# Altium PCB top_pcb.PcbDoc
Units mm, origin at the board's own origin, x right, y up, seen from the top; angles counter-clockwise.
Board outline 50 x 70 mm, 4 copper layers (Top Layer, Signal Layer 1, Signal Layer 2, Bottom Layer), stack 0.463 mm thick; 108 components, 71 nets, 364 pads, 151 vias.
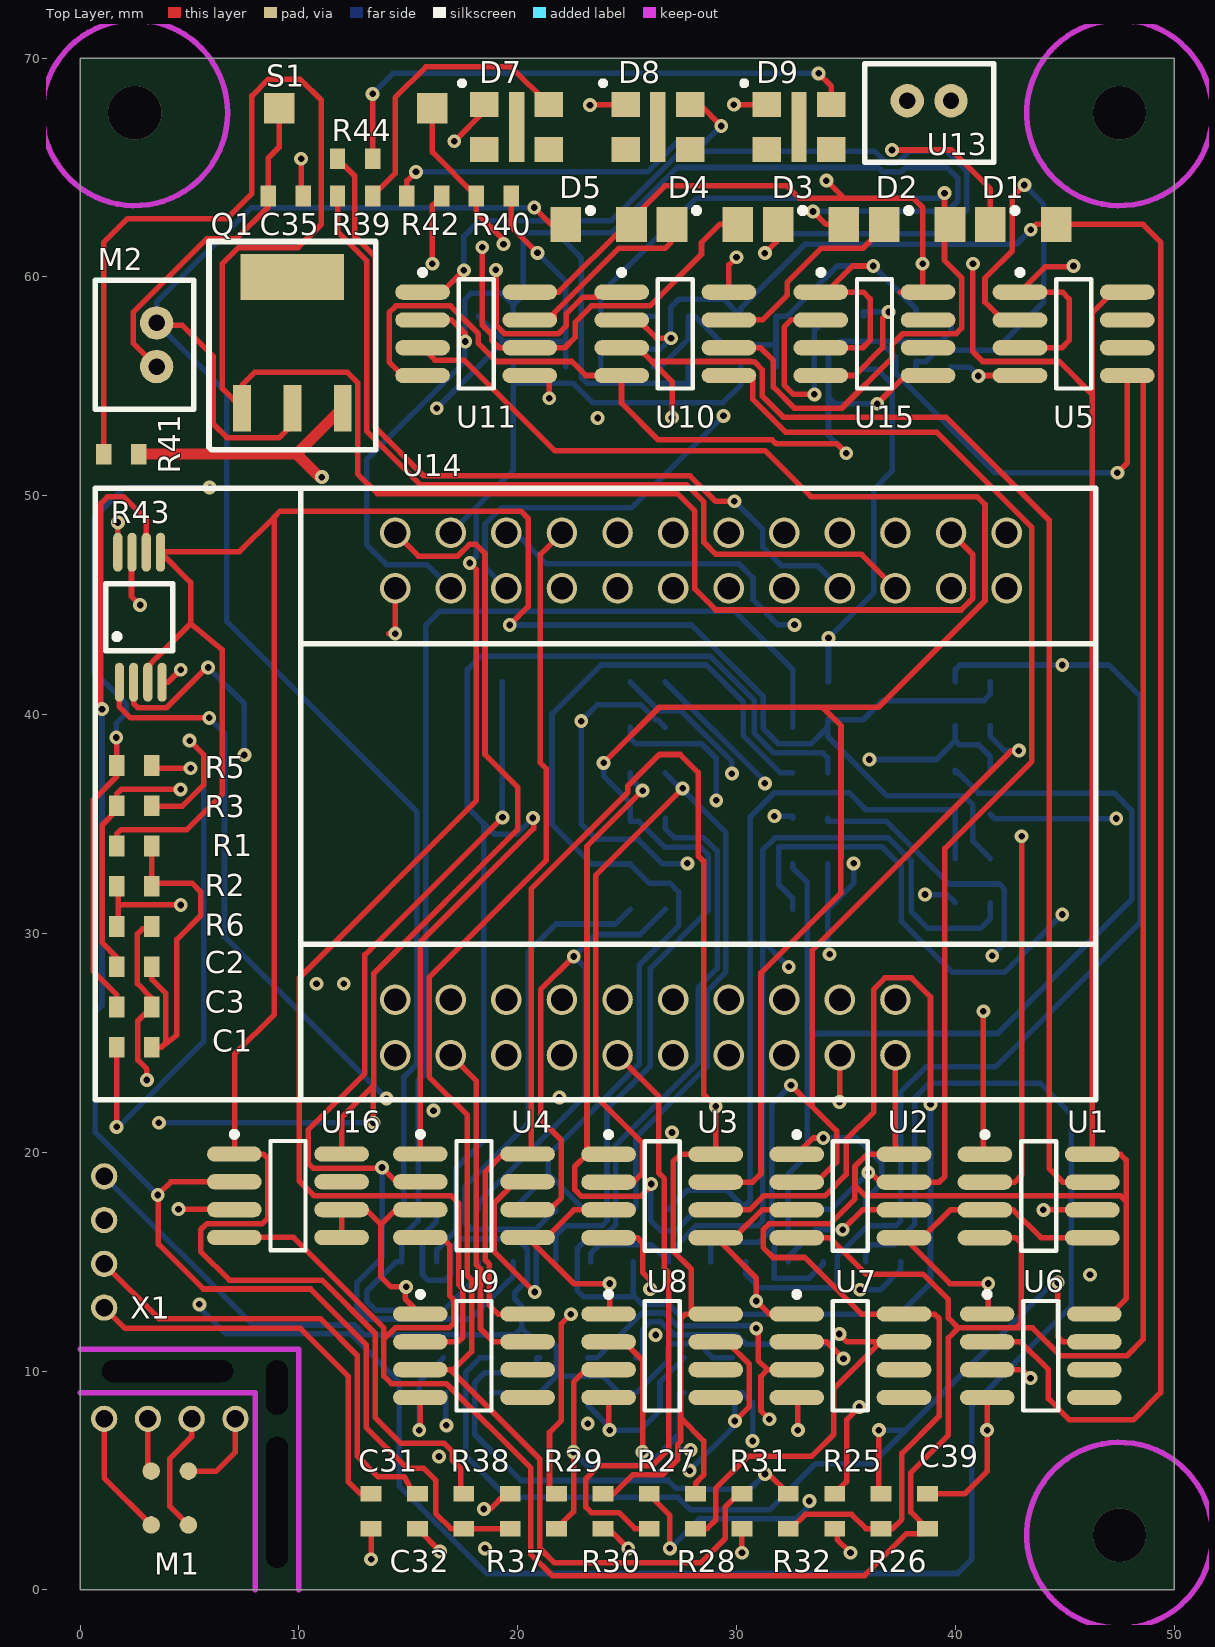
[diagram p0: Top Layer view]
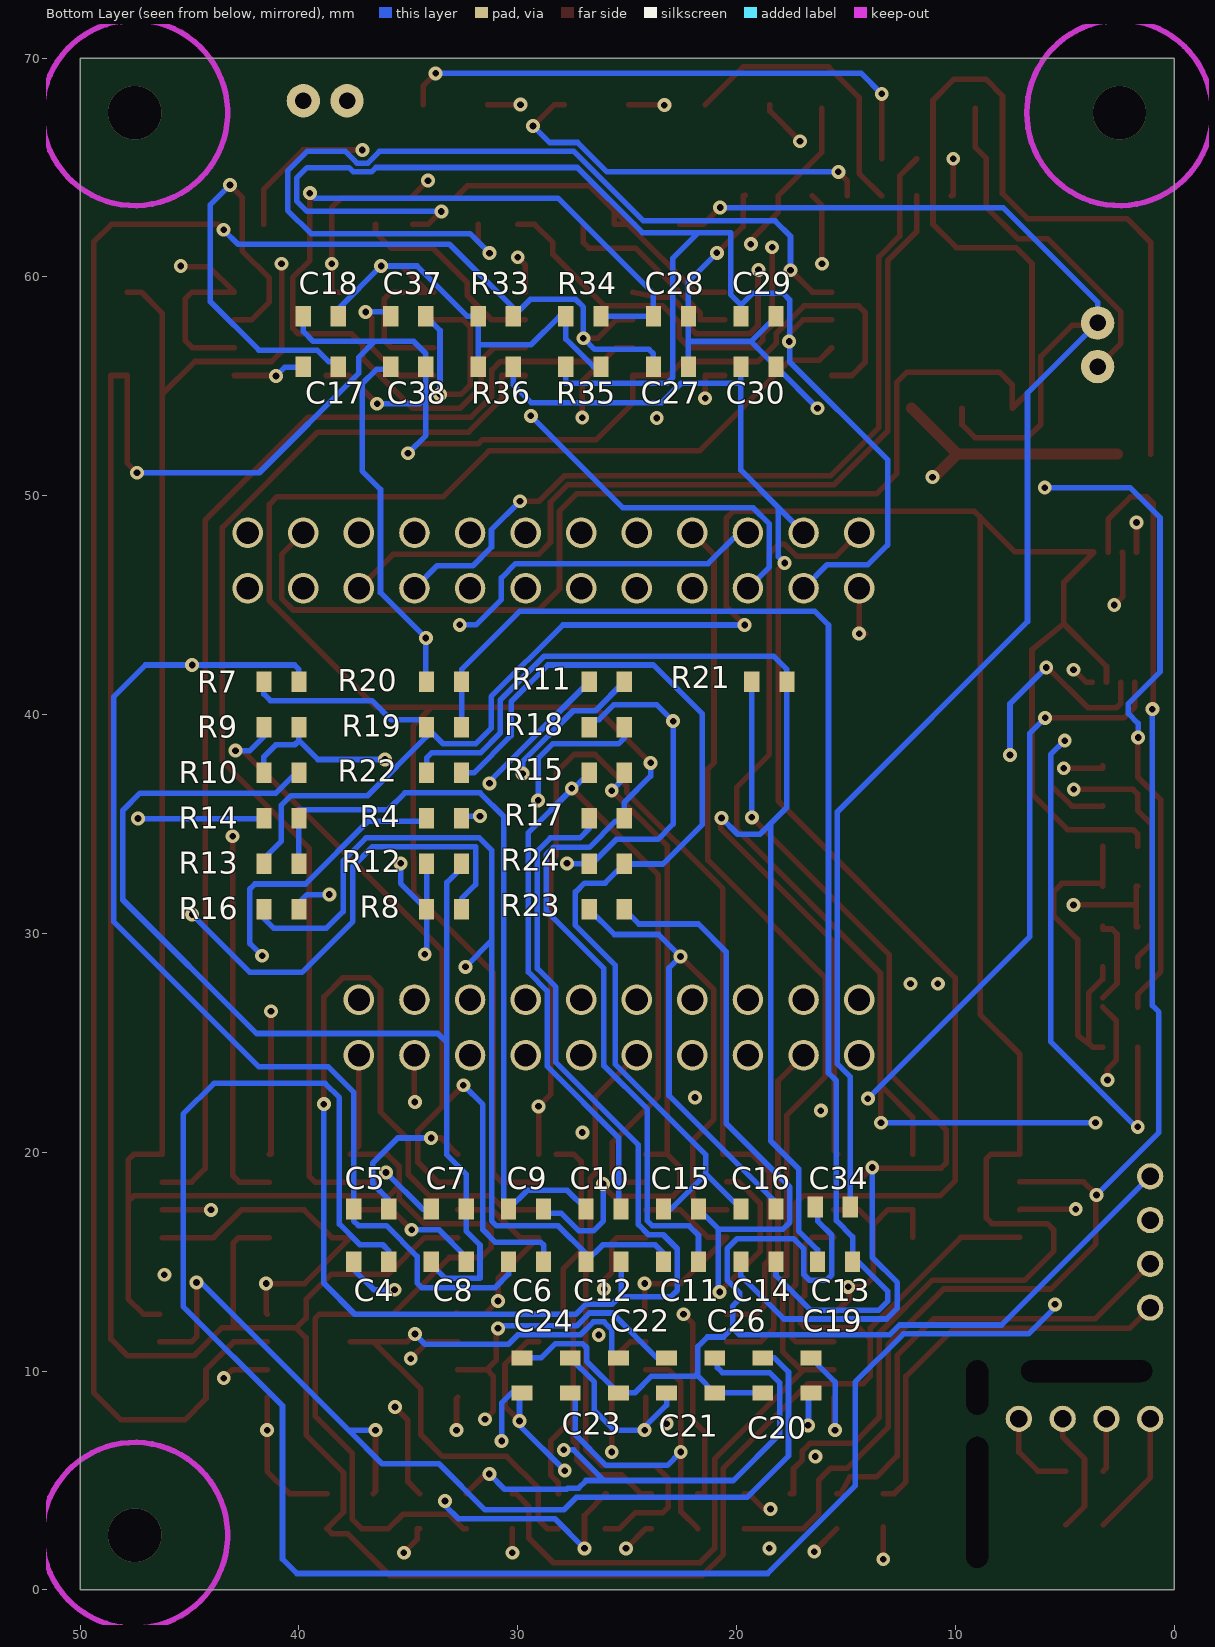
[diagram p1: Bottom Layer view, seen from below]
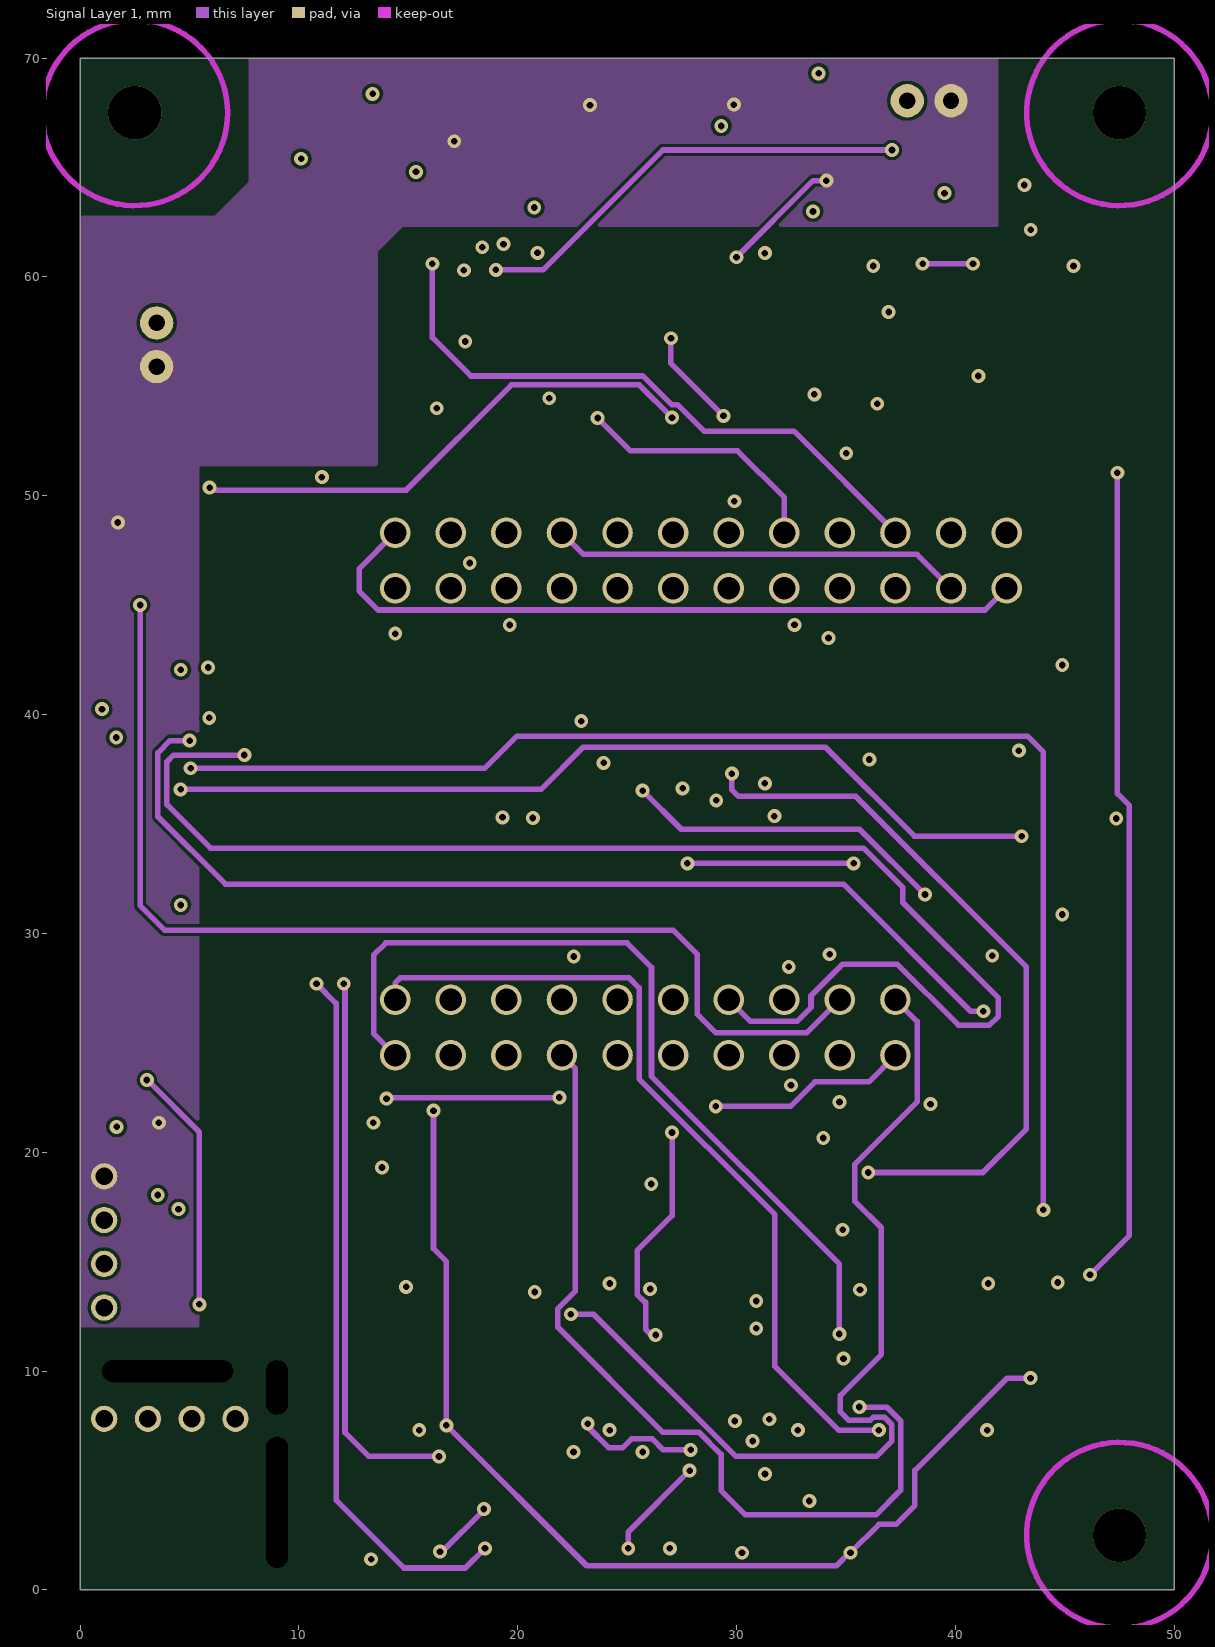
[diagram p2: Signal Layer 1]
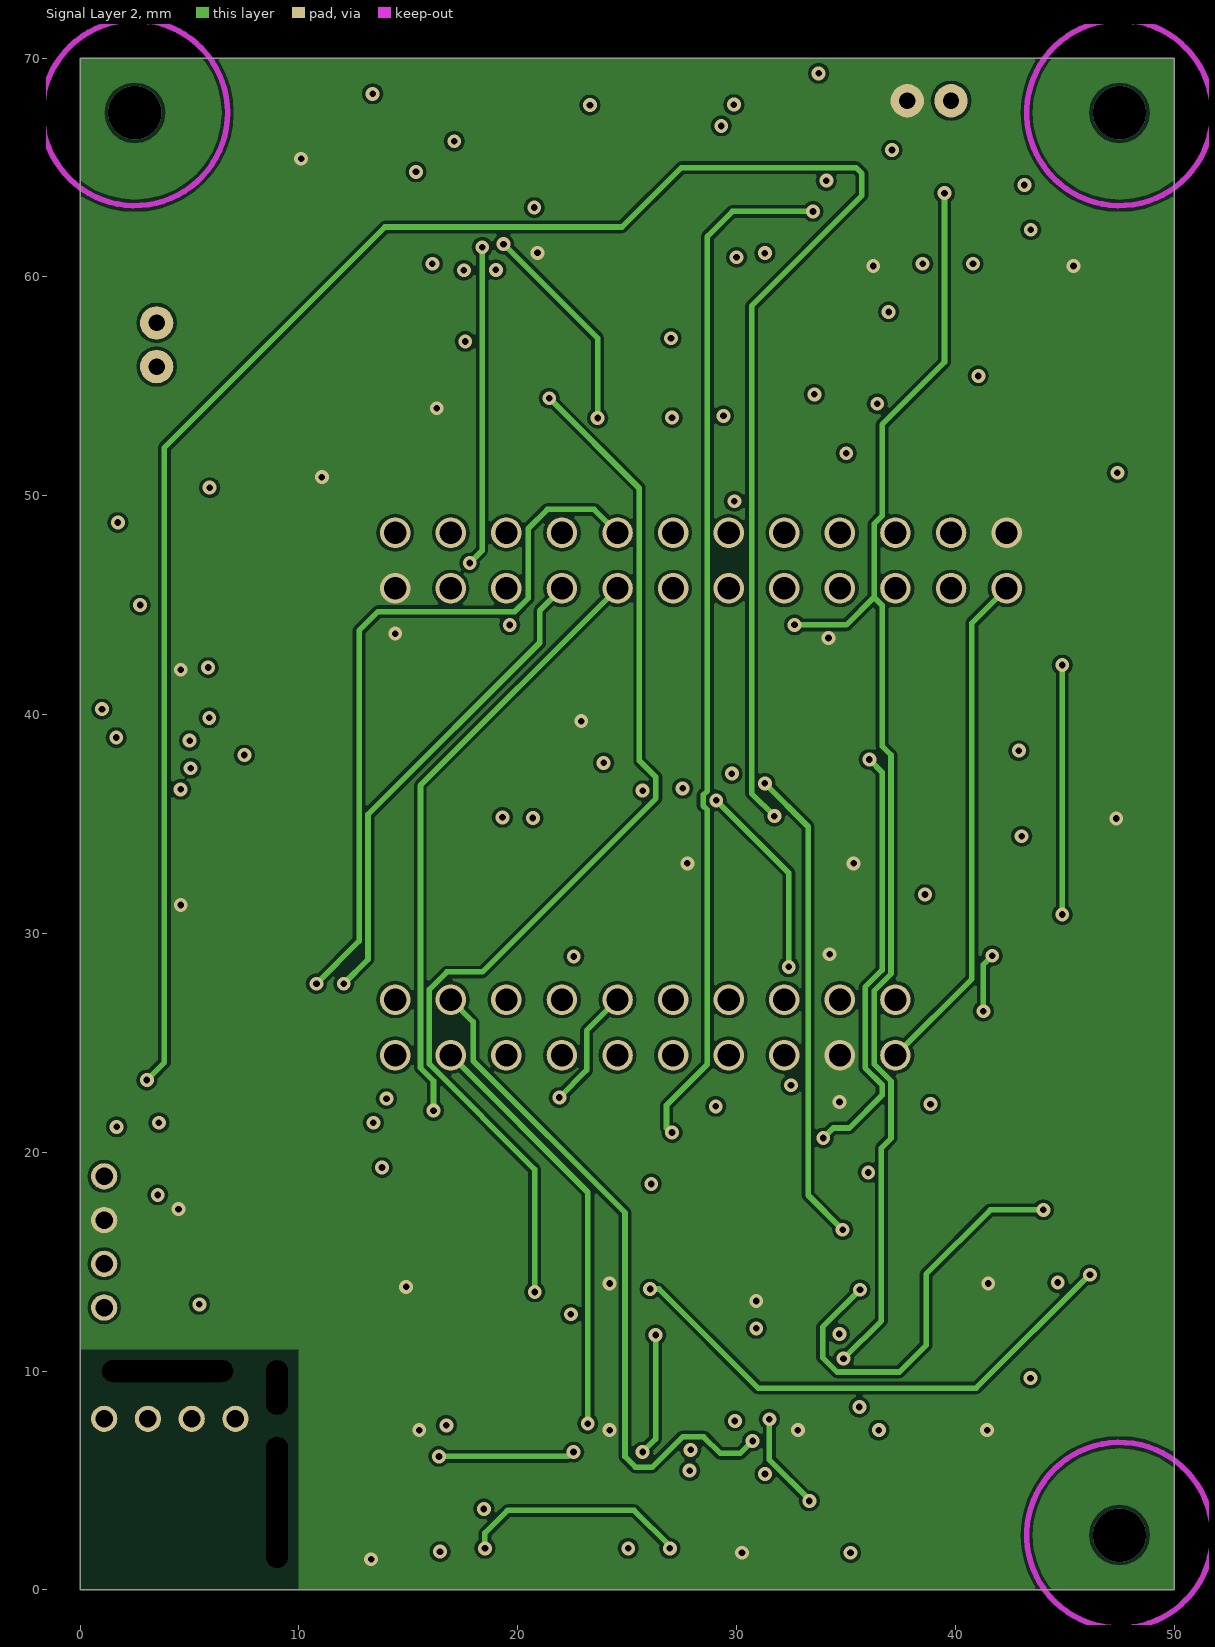
[diagram p3: Signal Layer 2]

## Layer stack, top to bottom
Top Solder: solder mask 0.0102, Solder Resist, Dk 3.5
Top Layer: signal copper 0.0356
Signal Layer 1: signal copper 0.036
Signal Layer 2: signal copper 0.036
Dielectric 1: dielectric 0.32, FR-4, Dk 4.8
Bottom Layer: signal copper 0.0356
Bottom Solder: solder mask 0.0102, Solder Resist, Dk 3.5

## Board outline
0,0 50,0 50,70 0,70

## Design rules (kind name [scope] priority, off if disabled: settings)
AssemblyTestPointUsage SilkToBoardRegionClearance_1 [All] p2:
AssemblyTestPointUsage SilkToBoardRegionClearance [All] p3:
Clearance [All] p1: gap=0.152
HoleSize [All] p1: absolutevalues=TRUE maxlimit=6.35 minlimit=0.3 maxpercent=80.000 minpercent=20.000
MatchedLengths DiffPair_DIFF100MatchedLengths [InDifferentialPairClass('DIFF100')] p1: tolerance=0.152 checknetsindiffpair=TRUE checkdiffpairvsdiffpair=FALSE checkothers=FALSE
MinimumSolderMaskSliver [All] p1: minsoldermaskwidth=0.1
MinimumSolderMaskSliver SilkscreenOverComponentPads_2 [All] p2: minsoldermaskwidth=0.254
MinimumSolderMaskSliver SilkToSolderMaskClearance_1 [IsPad] p3: minsoldermaskwidth=0.254
MinimumSolderMaskSliver SilkscreenOverComponentPads_1 [All] p4: minsoldermaskwidth=0.254
MinimumSolderMaskSliver SilkToSolderMaskClearance [IsPad] p5: minsoldermaskwidth=0.254
MinimumSolderMaskSliver SilkscreenOverComponentPads [All] p6: minsoldermaskwidth=0.254
PolygonConnect [All] p1: connectstyle=Direct reliefconductorwidth=0.254 reliefentries=4 polygonreliefangle="90 Angle" airgapwidth=0.254
RoutingVias [All] p1: holewidth=0.305 width=0.635 viastyle="Through Hole" minholewidth=0.305 minwidth=0.635 maxholewidth=0.711 maxwidth=1.27
SilkToBoardRegionClearance SilkToBoardRegionClearance_2 [All] p1:
SilkToSolderMaskClearance SilkToSolderMaskClearance_2 [IsPad] p1: minsilkscreentomaskgap=0.254 clearancetoexposedcopper=TRUE
SolderMaskExpansion [All] p1: expansion=0.102
UnpouredPolygon [All] p1: allowunpoured=FALSE
Width [All] p1: maxlimit=2.54 minlimit=0.152 preferedwidth=0.254
25 further rules are at their usual default settings.

## Classes and differential pairs
component class top: C34 C35 D5 M2 Q1 R41 U13
component class "PEAK DETECT": C27 C28 C29 C30 D1 D2 D3 D4 R33 R34 R35 R36 U10 U11
component class MIC_STAGE: C31 C32 M1 R37 R38 R43 U16 X1
component class MED_FILTER: C5 C6 C7 C8 R7 R8 R9 R10 R11 R12 U2
component class LOW_FILTER: C1 C2 C3 C4 R1 R2 R3 R4 R5 R6 U1
component class INVERTER: C17 C18 C37 C38 C39 U5 U15
component class HIGH_FILTER: C9 C10 C11 C12 R13 R14 R15 R16 R17 R18 U3
component class FIRE_FILTER: C13 C14 C15 C16 R19 R20 R21 R22 R23 R24 U4
component class COMPARATORS: C19 C20 C21 C22 C23 C24 C26 R25 R26 R27 R28 R29 R30 R31 R32 U6 U7 U8 U9
component class PSOC: D7 D8 D9 R39 R40 R42 R44 S1 U14

## Components (designator, comment, footprint, x,y, rotation, side; value= is the part's Value field where it differs from the comment)
C1 "100 nF" C0603#1 2.47,24.8 r180 top
C2 "100 nF" C0603#1 2.47,28.477 r180 top
C3 "100 nF" C0603#1 2.47,26.638 r0 top
C4 "100 nF" C0603#1 36.7,15 r180 bottom
C5 "10nF" C0603#1 36.7,17.4 r180 bottom
C6 "10nF" C0603#1 29.62,15 r180 bottom
C7 "15 nF" C0603#1 33.16,17.4 r180 bottom
C8 "15 nF" C0603#1 33.16,15 r0 bottom
C9 "68 nF" C0603#1 29.62,17.4 r180 bottom
C10 "68 nF" C0603#1 26.08,17.4 r180 bottom
C11 "100 nF" C0603#1 22.54,15 r0 bottom
C12 "100 nF" C0603#1 26.08,15 r0 bottom
C13 "C47nF" C0603#1 15.5,15 r0 bottom
C14 "C47nF" C0603#1 19,15 r0 bottom
C15 "68 nF" C0603#1 22.54,17.4 r0 bottom
C16 "68 nF" C0603#1 19,17.4 r0 bottom
C17 "10uF" C0603#1 39,55.9 r180 bottom
C18 "10uF" C0603#1 39,58.2 r180 bottom
C19 "1uF" C0603#1 16.6,9.8 r90 bottom
C20 "10nF" C0603#1 18.8,9.8 r90 bottom
C21 "1uF" C0603#1 23.2,9.8 r270 bottom
C22 "10nF" C0603#1 25.4,9.8 r90 bottom
C23 "1uF" C0603#1 27.6,9.8 r90 bottom
C24 "10nF" C0603#1 29.8,9.8 r270 bottom
C26 "10nF" C0603#1 21,9.8 r90 bottom
C27 "10uF" C0603#1 23,55.9 r180 bottom
C28 "10uF" C0603#1 23,58.2 r180 bottom
C29 "10uF" C0603#1 19,58.2 r180 bottom
C30 "10uF" C0603#1 19,55.9 r180 bottom
C31 "100 nF" C0603#1 13.3,3.6 r270 top
C32 "100 nF" C0603#1 15.418,3.6 r270 top
C34 "1uF" C0603#2 15.6,17.5 r180 bottom
C35 "10uF" C0603#1 9.4,63.7 r180 top
C37 "10uF" C0603#1 35,58.2 r180 bottom
C38 "10uF" C0603#1 35,55.9 r0 bottom
C39 "10uF" C0603#1 38.718,3.6 r90 top
D1 "D1V" D1206 43.1,62.4 r0 top
D2 "D1V" D1206 38.25,62.4 r0 top
D3 "D1V" D1206 33.4,62.4 r0 top
D4 "D1V" D1206 28.55,62.4 r0 top
D5 "D1V" D1206 23.7,62.4 r0 top
D7 "Green LED" MLEGRN-A1 19.95,66.85 r0 top
D8 "Red LED" MLERED-A1 26.4,66.85 r0 top
D9 "Blue LED" MLEBLU-A1 32.85,66.85 r0 top
M1 "Microphone" SPU0414HR5H-SB-7 4.1,4.2 r0 top
M2 "Motor" B2B-PH-K-S 3.5,56.9 r90 top
Q1 "STN3NF06L" SOT-223 9.7,54 r0 top
R1 "R1_5k" R0603 2.47,33.992 r0 top
R2 "R330" R0603 2.47,32.154 r0 top
R3 "R6_8k" R0603 2.47,35.83 r0 top
R4 "R3_3k" R0603 33.367,35.26 r180 bottom
R5 "R15k" R0603 2.47,37.669 r180 top
R6 "R680" R0603 2.47,30.315 r0 top
R7 "R22k" R0603 40.8,41.5 r180 bottom
R8 "R2_2k" R0603 33.367,31.1 r180 bottom
R9 "R68k" R0603 40.8,39.42 r180 bottom
R10 "R22k" R0603 40.8,37.34 r180 bottom
R11 "R68k" R0603 25.933,41.5 r180 bottom
R12 "R2_2k" R0603 33.367,33.18 r180 bottom
R13 "R1_5k" R0603 40.8,33.18 r180 bottom
R14 "R150" R0603 40.8,35.26 r180 bottom
R15 "R6_8k" R0603 25.933,37.34 r180 bottom
R16 "R2_2k" R0603 40.8,31.1 r0 bottom
R17 "R6_8k" R0603 25.933,35.26 r180 bottom
R18 "R220" R0603 25.933,39.42 r180 bottom
R19 "R2_2k" R0603 33.367,39.42 r180 bottom
R20 "R150" R0603 33.367,41.5 r180 bottom
R21 "R6_8k" R0603 18.5,41.5 r180 bottom
R22 "R2_2k" R0603 33.367,37.34 r180 bottom
R23 "R6_8k" R0603 25.933,31.1 r180 bottom
R24 "R150" R0603 25.933,33.18 r180 bottom
R25 "R10k" R0603 34.482,3.6 r90 top
R26 "R220k" R0603 36.6,3.6 r270 top
R27 "R10k" R0603 26.009,3.6 r270 top
R28 "R220k" R0603 28.127,3.6 r90 top
R29 "R10k" R0603 21.773,3.6 r90 top
R30 "R220k" R0603 23.891,3.6 r90 top
R31 "R15k" R0603 30.245,3.6 r90 top
R32 "R220k" R0603 32.364,3.6 r270 top
R33 "R10k" R0603 31,58.2 r0 bottom
R34 "R10k" R0603 27,58.2 r0 bottom
R35 "R10k" R0603 27,55.9 r180 bottom
R36 "R10k" R0603 31,55.9 r0 bottom
R37 "R2_2k" R0603 19.655,3.6 r90 top
R38 "R68k" R0603 17.536,3.6 r90 top
R39 "R2_2k" R0603 12.567,63.7 r180 top
R40 "R2_2k" R0603 18.9,63.7 r180 top
R41 "R2_2k" R0603 1.875,51.9 r180 top
R42 "R2_2k" R0603 15.733,63.7 r180 top
R43 "200k Potentiometer" 8-TSSOP 2.7,44.45 r0 top
R44 "R2_2k" R0603 12.567,65.4 r180 top
S1 "Switch" CHS-01TB 12.6,67.7 r90 top
U1 "LM833DT" soic8 43.8,18 r0 top
U2 "LM833DT" soic8 35.2,18 r0 top
U3 "LM833DT" soic8 26.6,18 r0 top
U4 "LM833DT" soic8 18,18.013 r0 top
U5 "TL7660CDR" soic8 45.4,57.4 r0 top
U6 "LM311DT" soic8 43.9,10.7 r0 top
U7 "LM311DT" soic8 35.2,10.7 r0 top
U8 "LM311DT" soic8 26.6,10.7 r0 top
U9 "LM311DT" soic8 18,10.7 r0 top
U10 "LM833DT" soic8 27.2,57.4 r0 top
U11 "LM833DT" soic8 18.1,57.4 r0 top
U13 "TPS61090" B2B-PH-K-S 38.8,68.05 r180 top
U14 "PSOC4" PSOC4XXX-BLE 14.4,35.1 r90 top
U15 "TL7660CDR" soic8 36.3,57.4 r0 top
U16 "LM833DT" soic8 9.5,18.013 r0 top
X1 "RA Connector" 951104-7622-AR 4.1,12.9 r0 top

## Footprints (in the part's own frame and the unit in brackets; to place one, negate y for a bottom-side part, rotate by r counter-clockwise, add the part's x,y. Pads: shape width x height; smd on the part's side, far side on the other; paste and mask are expansions set on the pad)
8-TSSOP [mm]
  oval 0.42x1.78 smd mask+0.064: 1(-0.904,-2.97) 2(-0.254,-2.97) 3(0.396,-2.97) 4(1.046,-2.97) 5(0.975,2.97) 6(0.325,2.97) 7(-0.325,2.97) 8(-0.975,2.97)
  silkscreen extent -1.53,-1.53 1.53,1.53
951104-7622-AR [mm]
  round 1.2 hole 0.8: 1(-3,6) 2(-3,4) 3(-3,2) 4(-3,0) 5(-3,-5.08) 6(-1,-5.08) 7(1,-5.08) 8(3,-5.08)
B2B-PH-K-S [mm]
  round 1.524 hole 0.75: 1(-1,0) 2(1,0)
  silkscreen extent -2.95,-1.7 2.95,2.8
C0603#1 [mm]
  rect 0.7x0.95 smd: 1(-0.8,0) 2(0.8,0)
C0603#2 [mm]
  rect 0.7x0.95 smd: 1(0.8,0) 2(-0.8,0)
CHS-01TB [mm]
  rect 1.4x1.4 smd: 1(0,3.5) 2(0,-3.5)
D1206 [mm]
  rect 1.4x1.6 smd: 1(-1.5,0) 2(1.5,0)
  silkscreen extent -0.51,0.51 -0.25,0.76
MLEBLU-A1 [mm]
  rect 1.3x1.15 smd: A(-1.475,1.025) C(1.475,1.025) ""(-1.475,-1.025) ""(1.475,-1.025)
  rect 0.7x3.2 smd: ""(0,0)
  silkscreen extent -2.6,1.9 -2.4,2.1
MLEGRN-A1 [mm]
  rect 1.3x1.15 smd: A(-1.475,1.025) C(1.475,1.025) ""(-1.475,-1.025) ""(1.475,-1.025)
  rect 0.7x3.2 smd: ""(0,0)
  silkscreen extent -2.6,1.9 -2.4,2.1
MLERED-A1 [mm]
  rect 1.3x1.15 smd: A(-1.475,1.025) C(1.475,1.025) ""(-1.475,-1.025) ""(1.475,-1.025)
  rect 0.7x3.2 smd: ""(0,0)
  silkscreen extent -2.6,1.9 -2.4,2.1
PSOC4XXX-BLE [mil]
  round 55 hole 40: 0.0(-320,0) 0.1(-420,0) 0.2(-320,-100) 0.3(-420,-100) 0.4(-320,-200) 0.5(-420,-200) 0.6(-420,-500) 0.7(-420,-600) 1.0(-420,-300) 1.1(-320,-400) 1.2(-420,-400) 1.3(-320,-600) 1.4(-320,-500) 1.5(-320,-700) 1.6(-320,-900) 1.7(-320,-800) 2.0(420,-1000) 2.1(520,-1000) 2.2(420,-900) 2.3(520,-900) 2.4(420,-800) 2.5(520,-800) 2.6(420,-700) 2.7(520,-700) 3.0(420,-400) 3.1(520,-400) 3.2(420,-300) 3.3(520,-300) 3.4(420,-200) 3.5(520,-200) 3.6(420,-100) 3.7(520,-100) 4.0(420,-500) 4.1(420,-600) 5.0(520,-600) 5.1(520,-500) GND1(-420,-800) GND2(420,0) GND3(520,-1100) VDDA(520,0) VDDD(-420,-900) VDDR(420,-1100) VREF(-320,-300) XRES(-420,-700)
  silkscreen extent -500,-1260 600,540
R0603 [mm]
  rect 0.7x0.95 smd: 1(-0.8,0) 2(0.8,0)
soic8 [mm]
  oval 2.5x0.7 smd: 1(-2.45,1.905) 2(-2.45,0.635) 3(-2.45,-0.635) 4(-2.45,-1.905) 5(2.45,-1.905) 6(2.45,-0.635) 7(2.45,0.635) 8(2.45,1.905)
  silkscreen extent -2.57,-2.5 0.8,2.93, body extent -2,-2.5 2,2.5, height 1.75
SOT-223 [mil]
  rect 32x83 smd: 1(-90.5,0) 2(0,0) 3(90.5,0)
  rect 186x83 smd: ""(0,236)
  silkscreen extent -150,-75 150,300
SPU0414HR5H-SB-7 [mm]
  round 0.8 smd: 1(0.85,1.23) 2(0.85,-1.23) 3(-0.85,-1.23) 4(-0.85,1.23)

## Part data
C1 C2 C3 C4 C11 C12 C31 C32: library part C100nF, "100 nF Surface Mount Capacitor"
C5 C6 C20 C22 C24 C26: library part C10nF, "10 nF Surface Mount Capacitor"
C7 C8: library part C15nF, "15 nF Surface Mount Capacitor"
C9 C10 C15 C16: library part C68nF, "68 nF Surface Mount Capacitor"
C13 C14: "47 nF Surface Mount Capacitor"
C17 C18 C27 C28 C29 C30 C35 C37 C38 C39: library part C10uF, "10 uF Surface Mount Capacitor"
C19 C21 C23 C34: library part C1uF, "1 uF Surface Mount Capacitor"
D1 D2 D3 D4 D5: "Standard 1V Diode"
D7: library part LED_G
D8: library part LED_R
D9: library part LED_B
M1: library part SPU0414HR5H-SB-7, "MIC MEMS ANALOG OMNI -22DB"
Q1: "N-Channel 4A Power MOSFET"
R1 R13: "1.5k Ohms Surface Mount Resistor"
R2: "330 Ohms Surface Mount Resistor"
R3 R15 R17 R21 R23: "6.8k Ohms Surface Mount Resistor"
R4: "3.3k Ohms Surface Mount Resistor"
R5 R31: "15k Ohms Surface Mount Resistor"
R6: "680 Ohms Surface Mount Resistor"
R7 R10: "22k Ohms Surface Mount Resistor"
R8 R12 R16 R19 R22 R37 R39 R40 R41 R42 R44: "2.2k Ohms Surface Mount Resistor"
R9 R11 R38: "68k Ohms Surface Mount Resistor"
R14 R20 R24: "150 Ohms Surface Mount Resistor"
R18: "220 Ohms Surface Mount Resistor"
R25 R27 R29 R33 R34 R35 R36: "10k Ohms Surface Mount Resistor"
R26 R28 R30 R32: "220k Ohms Surface Mount Resistor"
R43: library part MAX5160NEUA, "200k Digital Potentiometer (32 Tap)"
S1: "Surface Mount Switch"
U1 U2 U3 U4 U10 U11 U16: "IC Dual Audio Amplifier"
U5 U15: "IC Switched Cap Voltage Inverter"
U6 U7 U8 U9: "IC Comparator"
U13: "Power Electronics Connector"
U14: "PSOC4 Connector"
X1: library part HPM-06-02-T-S-RA, "Right Angle Board-to-Board Connector"

## Free pads (board coordinates)
  round 0 hole 1 slot 6 at 0 deg unplated: ""(4,10)
  round 0 hole 1 slot 6 at 90 deg unplated: ""(9,4)
  round 0 hole 1 slot 2.5 at 90 deg unplated: ""(9,9.25)

## Via types
v1: diameter 0.635, hole 0.305, Top Layer to Bottom Layer, 148 vias
v2: diameter 2.438, hole 2.438, Top Layer to Bottom Layer, 3 vias

## Nets (pads, with @x,y where several pads share a name; then routed paths per layer and width w, separated by ;. In a path a pad name is that pad's centre, name@x,y a point inside that pad or via, vN(x,y) a via of type N, cw(c..) or ccw(c..) an arc to the next point about the centre after c; other vN are vias at no path point)
GND: C18.2 C19.2 C21.2 C23.2 C27.2 C28.2 C29.2 C30.2 C31.2 C35.1 C38.2 C39.2 Q1.3 R2.1 R6.1 R8.1 R12.1 R14.1 R18.1 R20.1 R24.1 R31.1 R33.2 R34.2 R35.2 R36.2 R40.1 R41.1 R43.4 U1.3 U1.5 U2.3 U2.5 U3.3 U3.5 U4.3 U4.5 U5.1 U5.3 U6.1 U6.4 U7.1 U7.4 U8.1 U8.4 U9.1 U9.4 U13.2 U14.GND1 U14.GND2 U14.GND3 U15.1 U15.3 U16.3 U16.5 U16.6 X1.2 | length 204.4
  Top Layer w0.254: R6.1 1.745,30.315 1.745,31.2 ; R2.1 1.745,32.154 1.745,31.2 ; R43.4 4.03,41.48 v1(4.6,42.05) ; v1(4.5,17.4) 7.028,17.4 U16.3 ; v1(4.6,31.3) 1.845,31.3 1.745,31.2 ; v1(10.1,65.4) 10.1,63.725 C35.1 ; U16.5 U16.6 13.072,17.378 13.75,16.7 ; v1(13.3,1.4) C31.2@13.3,2.875 ; v1@14.109,43.7 v1(14.4,43.7) U14.GND2 ; v1@14.85,13.55 14.85,13.305 U9.1 ; v1(14.9,13.85) 14.208,13.85 13.75,14.308 13.75,16.7 ; v1@15.55,7.35 U9.4 ; U4.3 14.428,17.378 13.75,16.7 ; R40.1@19.6,63.725 R40.1 19.7,62.3 v1(20.9,61.1) ; v1@24.15,7.35 U8.4 ; U8.1 24.2,12.655 v1(24.2,14) 22.558,14 U4.5 21.308,16.108 22.565,17.365 U3.3 ; v1(30.245,1.7) R31.1 ; U7.4 32.8,8.745 v1(32.8,7.3) ; U2.3 31.165,17.365 29.895,16.095 U3.5 30.9,14.245 v1(30.9,13.2) 31.495,12.605 U7.1 U7.1@32.8,12.655 ; U15.3 35.765,56.765 36.1,57.1 36.1,59 35.795,59.305 U15.1@34.105,59.305 ; U15.1 U15.1@34.105,59.305 ; v1@34.72,22.32 U14.GND1 ; v1(36.245,60.5) 35.3,60.5 U15.1@34.105,59.305 ; C39.2 40.437,4.4 41.45,5.413 v1(41.45,7.3) ; v1@41.45,7.35 U6.4 ; U6.1 41.5,12.655 v1(41.5,14) 39.745,14 U2.5 38.495,16.095 39.765,17.365 42.635,17.365 43.905,16.095 U1.5 ; U5.3 44.865,56.765 45.2,57.1 45.2,59 44.895,59.305 U5.1 44.1,60.455 v1@45.355,60.455
  Top Layer w0.508: R41.1@2.6,51.9 9.899,51.9 ; v1(11.05,50.85) 10.949,50.85 9.899,51.9 ; Q1.3 9.899,51.9
  Signal Layer 1 w0.254: v1(27.75,33.2) v1(35.35,33.2)
  Bottom Layer w0.254: v1(15.5,7.3) 15.5,9.5 C19.2 ; v1(16.3,54) C30.2 19.35,57.05 ; C29.2 19.35,57.05 ; v1(20.9,61.1) 22.2,59.8 22.2,57.05 ; C27.2 22.2,57.05 ; v1(22.9,39.7) 22.9,35 23.6,34.3 25.5,34.3 26.62,33.18 R24.1 v1@27.73,33.18 ; v1(22.9,39.7) 23.653,40.453 25.605,40.453 26.288,39.77 26.383,39.77 R18.1 ; C21.2 23.2,8.444 24.2,7.444 v1(24.2,7.3) 25.6,7.3 26.5,8.2 26.5,9.5 C23.2 ; R35.2 26.544,55.9 27.8,57.156 R34.2 28.1,58.2 29.4,56.9 31.8,56.9 ; R36.2 31.8,56.9 ; v1@34.167,29.233 R12.1 ; R8.1 35.35,32.283 v1(35.35,33.2) ; R20.1 34.2,41.533 v1(34.2,43.5) 36.271,45.571 36.271,50.292 37.109,51.13 37.109,55.118 36.449,55.778 35.8,55.778 C38.2 ; C18.2 38.2,58.545 v1(36.245,60.5) 34.6,60.5 32.3,58.2 R33.2 31.8,56.9 ; R14.1@41.6,35.44 41.79,35.25 v1(47.35,35.25) ; 19.35,57.05 22.2,57.05
  other v1: 34.7,22.3 34.25,29.05 45.4,60.5
NetC1_1: C1.1 C2.1 R1.2 R2.2 | length 16.6
  Top Layer w0.254: C1.1 3.27,24.79 3.708,24.79 ; C2.1 3.27,27.915 3.912,27.273 3.912,24.994 3.708,24.79 ; R2.2 R2.2@3.27,32.283 ; R1.2 R2.2@3.27,32.283 ; R2.2@3.27,32.283 5.131,32.283 5.514,31.9 5.514,30.82 4.42,29.725 4.42,25.349 3.708,24.79
NetC1_2: C1.2 R3.2 R4.1 U1.1 | length 96.4
  Top Layer w0.254: v1(1.67,21.158) C1.2 ; R3.2 3.27,35.814 4.674,35.814 5.647,36.787 5.647,38.168 v1(5.004,38.811) ; v1(41.275,26.441) 41.275,19.905 U1.1
  Signal Layer 1 w0.254: v1(5.004,38.811) 4.115,38.811 3.556,38.252 3.556,35.331 6.637,32.25 34.882,32.25 40.691,26.441 v1(41.275,26.441)
  Signal Layer 2 w0.254: v1(41.275,26.441) 41.275,28.575 v1(41.681,28.981)
  Bottom Layer w0.254: v1(1.67,21.158) 1.752,21.158 5.647,25.053 5.647,38.168 v1(5.004,38.811) ; R4.1 34.167,35.128 36.832,35.128 39.701,32.259 42.01,32.259 42.24,32.029 42.24,29.54 v1(41.681,28.981)
NetC2_2: C2.2 R3.1 U1.2 | length 69.7
  Top Layer w0.254: C2.2 1.67,28.912 1.016,29.566 1.016,34.965 1.67,35.619 1.67,36.373 1.882,36.585 v1(4.594,36.585) ; U1.2 42.714,18.635 43.028,18.948 v1(43.028,34.442)
  Signal Layer 1 w0.254: v1(4.594,36.585) 21.065,36.585 22.987,38.506 34.061,38.506 38.125,34.442 v1(43.028,34.442)
NetC3_1: C3.1 R5.2 U1.7 U10.3 | length 112.2
  Top Layer w0.254: C3.1 1.67,27.203 0.61,28.264 0.61,36.1 1.67,37.16 R5.2@1.67,37.694 ; R5.2 v1@1.67,39.08 ; U10.3 25.502,56.765 26.133,56.134 ; v1(27.051,53.569) 27.051,55.216 26.133,56.134 ; U1.7 44.907,18.635 44.285,19.257 44.285,48.882 39.573,53.594 32.131,53.594 31.179,54.546 31.179,55.756 30.811,56.124 30.66,56.124 30.65,56.134 26.133,56.134
  Signal Layer 1 w0.254: v1(5.918,50.368) 6.033,50.253 14.896,50.253 19.71,55.067 25.552,55.067 v1(27.051,53.569)
  Bottom Layer w0.254: v1@1.597,39.003 v1(1.65,38.95) 1.65,39.6 2.1,40.05 2.1,40.5 0.65,41.95 0.65,49 2.018,50.368 v1(5.918,50.368)
NetC3_2: C3.2 C4.2 R4.2 R6.2 | length 201.2
  Top Layer w0.254: v1(3.05,23.3) 3.05,23.8 2.64,24.209 2.64,26.009 C3.2 ; C3.2@3.27,27.051 2.616,27.705 2.616,29.972 2.845,30.201 3.27,30.201 R6.2
  Signal Layer 1 w0.254: v1(3.05,23.3) 3.05,23.315 5.45,20.915 v1(5.45,13.05)
  Signal Layer 2 w0.254: v1(3.05,23.3) 3.85,24.1 3.85,52.2 13.931,62.281 24.765,62.281 27.481,64.997 35.453,64.997 35.73,64.72 35.73,63.72 30.683,58.674 30.683,36.398 v1(31.725,35.357)
  Bottom Layer w0.254: v1(5.45,13.05) 5.45,12.914 6.664,11.7 12.379,11.7 14.58,9.5 14.58,4.75 18.579,0.75 40.095,0.75 40.75,1.405 40.75,8.416 45.288,12.954 45.288,21.742 43.881,23.149 38.8,23.149 38.151,22.5 38.151,16.713 37.211,15.773 36.17,15.773 35.9,15.504 C4.2 ; v1(31.725,35.357) 32.567,35.357 R4.2
NetC4_1: C4.1 R5.1 U1.6 | length 86.7
  Top Layer w0.254: R5.1 3.27,37.541 5.041,37.541 v1(5.05,37.55) ; v1(44.018,17.365) U1.6
  Signal Layer 1 w0.254: v1(5.05,37.55) 18.5,37.55 19.964,39.014 43.286,39.014 44.018,38.282 v1(44.018,17.365)
  Signal Layer 2 w0.254: v1(35.636,13.716) 33.934,12.014 33.934,10.617 34.595,9.957 37.44,9.957 38.659,11.176 38.659,14.427 41.597,17.365 v1(44.018,17.365)
  Bottom Layer w0.254: v1(35.636,13.716) 36.576,13.716 37.5,14.64 C4.1
NetC5_1: C5.1 C6.1 R7.2 R8.2 | length 82.4
  Signal Layer 2 w0.254: v1(44.882,30.861) v1(44.882,42.266)
  Bottom Layer w0.254: C6.1 30.42,14.427 31.03,13.818 34.392,13.818 34.595,14.021 34.595,15.24 35.998,16.644 37.278,16.644 37.5,16.866 37.5,22.749 38.651,23.9 41.832,23.9 48.456,30.524 48.456,40.825 47.015,42.266 v1(44.882,42.266) 40.203,42.266 40,42.062 R7.2 ; R8.2 32.567,31.594 31.928,32.233 31.928,33.96 36.64,33.96 37.533,33.067 37.533,30.548 39.861,28.219 42.24,28.219 v1(44.882,30.861)
NetC5_2: C5.2 R9.2 R10.1 U2.1 | length 34.3
  Top Layer w0.254: U2.1 33.495,20.65 v1(33.96,20.65)
  Signal Layer 2 w0.254: v1(33.96,20.65) 34.417,21.107 35.154,21.107 36.65,22.604 36.65,23.084 35.876,23.859 35.876,27.545 36.65,28.32 36.65,37.366 v1(36.068,37.948)
  Bottom Layer w0.254: v1(33.96,20.65) 35.484,20.65 36.627,19.507 36.627,18.561 35.9,17.834 C5.2 ; v1(36.068,37.948) 39.136,37.948 40,38.811 ; R9.2@40,39.48 40,38.811 ; R10.1@41.6,37.46 41.6,38.075 41.054,38.621 40.19,38.621 40,38.811
NetC6_2: C6.2 R9.1 U2.2 | length 39.8
  Top Layer w0.254: v1(32.487,23.063) 33.452,22.098 ; U2.2 33.655,18.635 34.569,19.549 34.569,20.98 33.452,22.098 ; v1(42.9,38.35) 42.575,38.35 33.452,29.227 33.452,22.098
  Bottom Layer w0.254: C6.2 28.82,15.76 28.944,15.884 31.023,15.884 31.598,16.459 31.598,22.174 v1(32.487,23.063) ; R9.1@41.6,39.48 41.6,38.994 42.244,38.35 v1(42.9,38.35)
NetC7_1: C7.1 R11.2 U2.7 U10.5 | length 94.9
  Top Layer w0.254: U10.5 30.734,55.495 30.734,54.416 32.242,52.908 39.141,52.908 43.497,48.553 43.497,37.858 39.522,33.884 39.522,18.898 39.26,18.635 36.551,18.635 36.11,19.075 v1(36.017,19.075)
  Signal Layer 1 w0.254: v1(29.784,37.3) 29.784,36.561 30.086,36.258 35.446,36.258 43.243,28.461 43.243,21.069 41.25,19.075 v1(36.017,19.075)
  Bottom Layer w0.254: R11.2 26.457,40.177 27.464,40.177 29.784,37.857 v1(29.784,37.3) ; C7.1 34.342,17.4 v1(36.017,19.075)
NetC7_2: C7.2 C8.2 R10.2 R12.2 | length 53
  Bottom Layer w0.254: R12.2 32.567,32.998 33.236,32.329 33.236,25.006 ; C8.2 33.96,14.884 33.321,14.246 31.725,14.246 31.725,15.76 32.36,16.396 32.36,19 33.236,19.876 33.236,25.006 ; R10.2 40,37.46 41.051,36.409 47.259,36.409 48.05,35.618 48.05,31.54 41.935,25.425 33.655,25.425 33.236,25.006
NetC8_1: C8.1 R11.1 U2.6 | length 34.8
  Top Layer w0.254: v1(34.849,16.459) 35.755,17.365 U2.6
  Signal Layer 2 w0.254: v1(31.293,36.855) 33.274,34.874 33.274,18.034 v1(34.849,16.459)
  Bottom Layer w0.254: R11.1 31.293,36.941 v1(31.293,36.855) ; C8.1 32.36,15.222 33.597,16.459 v1(34.849,16.459)
NetC9_1: C9.1 C10.1 R13.2 R14.2 | length 34.6
  Bottom Layer w0.254: C10.1 27.743,18.263 29.557,18.263 C9.1 30.42,17.593 30.632,17.805 30.632,35.331 31.722,36.421 35.154,36.421 35.923,35.652 40,35.652 40,35.44 R13.2@40,33.42
NetC9_2: C9.2 R15.2 R16.1 U3.1 | length 47
  Top Layer w0.254: U3.1 U3.1@23.165,19.905 ; v1(25.705,36.525) 23.165,33.985 U3.1@23.165,19.905 ; v1(26.1,18.55) 26.1,18.455 25.64,17.994 22.9,17.994 22.606,18.288 22.606,19.346 U3.1@23.165,19.905
  Signal Layer 1 w0.254: v1(25.705,36.525) 27.471,34.759 35.624,34.759 v1(38.607,31.776)
  Bottom Layer w0.254: R15.2 25.133,37.097 v1(25.705,36.525) ; v1(26.1,18.55) 26.086,18.536 26.086,16.866 26.543,16.408 27.206,16.408 28.019,17.221 28.82,17.221 C9.2 ; v1(38.607,31.776) 39.624,31.776 R16.1@40,31.4
NetC10_2: C10.2 R15.1 U3.2 | length 44.7
  Top Layer w0.254: U3.2 25.29,18.635 25.679,19.025 25.679,20.447 23.571,22.555 23.571,32.664 v1(27.534,36.627)
  Bottom Layer w0.254: C10.2 25.387,17.507 25.387,20.663 28.662,23.937 28.662,27.377 29.513,28.228 29.513,34.609 27.534,36.589 v1(27.534,36.627) ; R15.1 v1@27.49,36.583
NetC11_1: C11.1 R17.2 U3.7 U11.3 | length 108.8
  Top Layer w0.254: U11.3 16.215,56.2 17.55,56.2 21.7,52.05 31.313,52.05 33.401,49.962 40.996,49.962 41.351,49.606 41.351,45.201 36.485,40.335 33.934,40.335 ; v1(23.927,37.795) 26.467,40.335 33.934,40.335 ; U3.7 30.734,18.635 31.115,19.016 31.115,28.194 34.773,31.852 34.753,31.871 34.753,33.467 34.773,33.486 34.773,39.497 33.934,40.335
  Bottom Layer w0.254: C11.1 21.74,16.205 22.172,16.637 23.851,16.637 24.079,16.866 24.079,21.971 26.06,23.952 26.06,28.402 28.7,31.042 28.7,33.6 28.365,33.935 26.721,33.935 25.527,35.128 25.133,35.128 25.133,35.979 23.927,37.186 v1(23.927,37.795)
NetC11_2: C11.2 C12.2 R16.2 R18.2 | length 58.7
  Signal Layer 2 w0.254: v1(29.07,36.081) 32.385,32.766 v1(32.385,28.473)
  Bottom Layer w0.254: C11.2 23.34,15.39 23.724,15.773 26.107,15.773 C12.2 26.88,15.367 28.15,16.637 30.963,16.637 31.191,16.866 31.191,29.667 ; R18.2 25.133,38.925 25.4,38.659 28.407,38.659 29.07,37.995 v1(29.07,36.081) ; v1(32.385,28.473) 31.191,29.667 ; R16.2@41.6,31.4 41.6,30.683 41.143,30.226 38.753,30.226 37.982,30.997 37.982,33.318 36.934,34.366 31.75,34.366 31.191,33.807 31.191,29.667
NetC12_1: C12.1 R17.1 U3.6 | length 77
  Top Layer w0.254: U3.6 30.59,17.365 31.231,18.006 34.033,18.006 35.003,18.975 35.003,20.576 36.271,21.844 36.271,27.457 36.779,27.965 37.998,27.965 38.862,27.102 v1(38.862,22.2)
  Bottom Layer w0.254: 25.222,13.4 23,13.4 22.711,13.689 22.711,15.591 23.35,16.231 24.019,16.231 24.486,16.697 24.486,20.336 28.256,24.106 28.256,27.545 29.106,28.396 29.106,33.768 28.509,34.366 27.165,34.366 26.733,34.798 R17.1 ; C12.1 25.28,14.427 25.28,13.458 25.678,13.06 26.884,13.06 27.345,12.598 37.448,12.598 38.862,14.013 v1(38.862,22.2)
NetC13_1: C13.1 C14.1 R19.2 R20.2 | length 59.5
  Bottom Layer w0.254: C14.1 18.2,14.361 16.626,12.786 13.5,12.786 13.1,13.186 13.1,13.65 14.45,15 C13.1 14.7,16.129 15.443,16.872 15.443,23.266 15.799,23.622 15.799,44.094 16.434,44.729 29.9,44.729 32.567,42.062 R19.2
NetC13_2: C13.2 R21.2 R22.1 U4.1 | length 68.8
  Top Layer w0.254: U4.1@15.371,19.918 15.545,20.092 15.545,29.604 20.726,34.785 20.726,35.233 v1(20.688,35.271)
  Bottom Layer w0.254: C13.2 16.3,15.538 17.164,16.402 17.164,19.247 18.44,20.523 18.44,35.027 ; v1(20.688,35.271) 19.948,34.531 18.936,34.531 18.44,35.027 ; R22.1 34.167,38.02 33.934,38.252 31.699,38.252 30.8,39.152 30.8,40.66 28.788,42.672 18.31,42.672 17.7,42.062 17.7,35.767 18.44,35.027
NetC14_2: C14.2 R21.1 U4.2 | length 45.8
  Top Layer w0.254: v1@13.779,19.279 10.649,19.279 10.421,19.507 10.421,21.012 13.016,23.608 13.016,29.019 v1(19.3,35.304) ; v1(13.8,19.3) U4.2@14.452,18.648
  Bottom Layer w0.254: v1(13.8,19.3) 13.8,15.192 12.65,14.042 12.65,12.88 13.15,12.38 17.841,12.38 19.8,14.339 C14.2 ; v1(19.3,35.304) R21.1
NetC15_1: C15.1 R23.2 U4.7 U11.5 | length 85.5
  Top Layer w0.254: U4.7 19.898,18.648 18.92,17.67 18.92,15.469 v1(20.775,13.614) ; U11.5 21.438,55.495 v1(21.438,54.458)
  Signal Layer 2 w0.254: v1(20.775,13.614) 20.775,19.214 15.962,24.027 15.962,27.443 16.764,28.245 18.39,28.245 26.314,36.17 26.314,37.135 25.552,37.897 25.552,50.343 v1(21.438,54.458)
  Bottom Layer w0.254: v1(20.775,13.614) 20.836,13.676 20.836,16.473 ; C15.1@21.74,17.272 C15.1 20.825,16.485 17.882,16.485 17.571,16.796 17.571,18.409 20.472,21.311 20.472,29.159 21.742,30.429 24.463,30.429 R23.2
NetC15_2: C15.2 C16.2 R22.2 R24.2 | length 47.2
  Bottom Layer w0.254: C16.2 21.4,19 ; C15.2 23,17.4 21.4,19 ; R22.2 32.002,37.34 30.3,39.042 30.3,40.585 28.619,42.266 23.8,42.266 21.565,40.03 21.565,34.976 23.368,33.172 25.133,33.172 26.006,32.3 26.95,32.3 27.35,31.9 27.363,31.9 27.363,30.365 25.552,28.555 25.552,24.028 21.4,19.876 21.4,19
NetC16_1: C16.1 R23.1 U4.6 | length 32.7
  Top Layer w0.254: U4.6 21.463,17.378 21.996,17.911 21.996,20.549 21.042,21.503 21.042,27.432 v1(22.559,28.949)
  Bottom Layer w0.254: C16.1 18.2,17.7 23.089,22.589 23.089,28.42 v1(22.559,28.949) 23.56,29.95 25.583,29.95 R23.1
NetC17_1: C17.1 U5.4 | length 3.3
  Top Layer w0.254: v1(41.046,55.474) 41.068,55.495 U5.4
  Bottom Layer w0.254: C17.1 39.8,55.88 40.64,55.88 v1(41.046,55.474)
NetC17_2: C17.2 U5.2 | length 20.9
  Top Layer w0.254: U5.2 42.166,58.035 41.351,58.85 41.351,59.944 42.596,61.189 42.596,63.646 v1(43.15,64.2)
  Bottom Layer w0.254: C17.2 38.2,56.121 38.633,56.121 39.167,56.654 41.834,56.654 44.044,58.864 44.044,63.306 v1(43.15,64.2)
NetC18_1: C18.1 C38.1 C39.1 U1.4 U2.4 U3.4 U4.4 U5.5 U10.4 U11.4 U15.5 U16.4 | length 261
  Top Layer w0.254: U16.4 9.754,16.108 13.886,11.976 13.886,11.461 ; U4.4 16.535,16.108 16.888,15.755 16.888,13.447 17.079,13.256 17.079,12.189 16.866,11.976 14.4,11.976 13.886,11.461 ; U11.4 14.734,55.495 14.121,56.109 14.121,58.367 14.427,58.674 16.926,58.674 18.197,57.403 18.197,56.962 19.025,56.134 22.475,56.134 23.114,55.495 U10.4@24.74,55.495 ; U3.4 25.459,16.095 25.705,15.85 25.705,14.503 26.05,14.158 v1(26.05,13.75) ; U10.4 U10.4@24.74,55.495 ; U2.4 34.252,16.095 35.914,14.433 38.517,14.433 39.675,13.275 39.675,12.425 40.13,11.97 ; v1(35.013,51.943) 34.581,52.375 31.801,52.375 31.626,52.55 26.419,52.55 24.74,54.229 U10.4@24.74,55.495 ; v1(36.428,54.204) 37.719,55.495 U15.5 ; U1.4 42.757,16.095 43.002,15.85 43.002,12.192 42.78,11.97 ; v1(47.4,51.05) 47.854,51.504 47.854,55.495 48.592,55.495 48.592,11.457 47.835,10.7 44.8,10.7 43.53,11.97 42.78,11.97 ; 13.886,11.461 13.886,9.768 14.224,9.43 16.732,9.43 20.599,5.563 20.599,1.626 21.575,0.65 35.848,0.65 37.774,2.576 38.494,2.576 C39.1 37.964,3.555 37.964,5.359 39.675,7.071 39.675,11.515 40.13,11.97 ; 40.13,11.97 42.78,11.97
  Signal Layer 1 w0.254: v1(46.15,14.4) 47.947,16.197 47.947,35.847 47.4,36.394 v1(47.4,51.05)
  Signal Layer 2 w0.254: v1(26.05,13.75) 26.458,13.75 30.988,9.22 40.945,9.22 v1@46.162,14.438
  Bottom Layer w0.254: 34.429,56.718 34.2,56.49 ; v1(35.013,51.943) 34.2,52.756 34.2,54.501 ; v1(36.428,54.204) 34.497,54.204 34.2,54.501 ; 36.539,57.061 37.261,56.339 37.261,55.602 41.812,51.05 v1(47.4,51.05) ; C18.1 39.8,57.506 39.355,57.061 34.76,57.061 34.2,56.501 34.2,56.49 ; 34.2,54.501 34.2,56.49
NetC19_1: C19.1 R25.1 U6.3 U14.3.0 | length 81.7
  Top Layer w0.254: R25.1 34.595,2.8 34.595,2.311 v1(35.206,1.7) ; U6.3 43.046,10.065 v1(43.434,9.677)
  Signal Layer 1 w0.254: v1(16.15,21.9) 16.15,15.6 16.739,15.011 v1(16.739,7.518) 23.154,1.103 34.562,1.103 v1@35.206,1.748 ; v1@35.259,1.8 v1@35.206,1.748 ; v1(43.434,9.677) 42.367,9.677 38.151,5.461 38.151,3.861 37.287,2.997 36.503,2.997 v1(35.206,1.7) v1@35.206,1.748
  Signal Layer 2 w0.254: v1(16.15,21.9) 16.15,23.264 15.556,23.859 15.556,36.742 15.545,36.753 U14.3.0
  Bottom Layer w0.254: C19.1 16.713,9 16.713,7.544 v1(16.739,7.518)
NetC20_2: C20.2 R26.1 U6.7 U14.0.0 | length 84.1
  Top Layer w0.254: v1(36.5,7.3) 36.5,4.5 R26.1 R26.1@36.601,4.4 ; v1(44.679,14.046) 44.679,11.564 44.907,11.335 U6.7
  Signal Layer 1 w0.254: U14.0.0 14.4,27.735 14.63,27.965 25.095,27.965 25.55,27.511 25.55,23.35 31.75,17.15 31.75,10.211 34.661,7.3 v1(36.5,7.3)
  Bottom Layer w0.254: C20.2 18.271,10.6 17.628,9.957 17.628,6.122 19.521,4.229 27.325,4.229 27.897,3.658 31.496,3.658 33.604,5.766 36.195,5.766 37.729,7.3 ; v1(36.5,7.3) 37.729,7.3 ; v1(44.679,14.046) 44.475,14.046 37.729,7.3
NetC21_1: C21.1 R27.1 U7.3 U14.3.1 | length 105.8
  Top Layer w0.254: R27.1 25.959,4.4 26.95,3.409 v1(26.95,1.9) ; v1(30.9,11.95) 30.986,11.864 30.986,10.492 31.413,10.065 ; v1(31.5,7.8) 31.115,8.185 31.115,9.754 31.413,10.065 ; U7.3 31.413,10.065
  Signal Layer 1 w0.254: v1(10.8,27.7) 11.7,26.8 11.7,4.1 14.8,1 17.6,1 v1(18.5,1.9)
  Signal Layer 2 w0.254: v1(10.8,27.7) 12.751,29.651 12.751,43.84 13.614,44.704 19.863,44.704 20.472,45.314 20.472,48.493 21.357,49.378 23.49,49.378 U14.3.1 ; v1(18.5,1.9) 18.5,2.6 19.532,3.632 25.318,3.632 26.95,2 v1(26.95,1.9) ; v1(31.5,7.8) 31.5,5.944 33.325,4.119 v1(33.325,4.064)
  Bottom Layer w0.254: C21.1 23.63,10.6 25.683,12.653 26.716,12.653 27.304,12.065 30.785,12.065 v1(30.9,11.95) ; v1(26.95,1.9) 28.3,3.25 32.714,3.25 33.325,3.861 v1(33.325,4.064)
NetC22_2: C22.2 R28.1 U7.7 U14.0.1 | length 67.2
  Top Layer w0.254: R28.1 28.651,2.8 29.058,3.206 29.058,4.648 30.509,6.1 33.43,6.1 34.442,7.112 34.442,9.195 U7.7@36.583,11.335 ; v1(34.696,11.691) 35.052,11.335 U7.7@36.583,11.335 ; U7.7 U7.7@36.583,11.335
  Signal Layer 1 w0.254: U14.0.1 13.411,25.421 13.411,29.007 13.97,29.566 24.994,29.566 26.111,28.448 26.111,23.47 34.696,14.884 v1(34.696,11.691)
  Bottom Layer w0.254: C22.2@25.527,10.6 C22.2 25.703,10.903 25.703,11.897 26.053,12.247 26.547,12.247 27.136,11.659 29.997,11.659 30.429,11.227 34.233,11.227 v1(34.696,11.691)
NetC23_1: C23.1 R29.1 U8.3 U14.3.2 | length 70.4
  Top Layer w0.254: R29.1 22.55,3.577 v1(22.55,6.3) 22.55,9.5 23.115,10.065 U8.3
  Signal Layer 1 w0.254: v1(12.05,27.7) 12.106,27.644 12.106,7.194 13.2,6.1 v1(16.4,6.1)
  Signal Layer 2 w0.254: v1(12.05,27.7) 13.157,28.807 13.157,35.433 21.006,43.282 21.006,44.754 U14.3.2 ; v1(16.4,6.1) 22.3,6.1 v1@22.6,6.4
  Bottom Layer w0.254: v1(22.55,6.3) 23.16,5.69 25.959,5.69 27.381,7.112 27.381,9 C23.1
NetC24_2: C24.2 R30.1 U8.7 U14.0.2 | length 49.7
  Top Layer w0.254: R30.1 24.15,2.8 v1(25.05,1.9) ; U8.7 29.57,11.335 30.579,10.326 30.579,10.324 30.582,10.322 30.582,8.382 v1(29.921,7.722)
  Signal Layer 1 w0.254: v1(25.05,1.9) 25.05,2.647 v1(27.853,5.45)
  Signal Layer 2 w0.254: U14.0.2 17.958,25.954 17.958,24.181 24.9,17.239 24.9,6.088 25.375,5.613 26.154,5.613 27.538,6.997 28.497,6.997 29.258,6.236 30.162,6.236 v1(30.734,6.807)
  Bottom Layer w0.254: v1(27.853,5.45) 29.921,7.518 v1(29.921,7.722) C24.2@29.921,9 ; C24.2 C24.2@29.921,9 ; v1(30.734,6.807) 30.734,8.543 30.277,9 C24.2@29.921,9
NetC26_2: C26.2 R32.1 U9.7 U14.0.3 | length 65
  Top Layer w0.254: U14.0.3 18.108,23.264 18.108,14.857 18.299,14.666 18.299,11.934 18.898,11.335 U9.7 ; v1(31.3,5.3) 31.464,5.3 R32.1
  Signal Layer 1 w0.254: v1(23.2,7.6) 23.2,7.456 24.156,6.5 24.8,6.5 25.2,6.9 26.15,6.9 26.65,6.4 v1(27.9,6.4)
  Signal Layer 2 w0.254: U14.0.3 23.2,18.172 v1(23.2,7.6)
  Bottom Layer w0.254: C26.2 20.879,10.6 20.879,10.16 20.65,9.931 18.491,9.931 18.034,9.474 18.034,7.112 20.146,5 26.05,5 ; v1(27.9,6.4) 27.45,6.4 26.05,5 ; v1(31.3,5.3) 30.6,4.6 27.769,4.6 27.716,4.653 27.218,4.653 26.886,4.985 26.886,5 26.05,5
NetC27_1: C27.1 D1.2 R33.1 U6.2 U10.2 U14.3.4 | length 117.4
  Top Layer w0.254: U10.2 25.506,58.035 26.341,57.2 v1(27,57.2) ; U6.2 42.977,11.335 44.247,10.065 44.247,8.738 45.212,7.772 48.133,7.772 49.379,9.019 49.379,61.593 48.573,62.4 43.688,62.4 v1(43.442,62.154)
  Signal Layer 1 w0.254: v1(27,57.2) 27,56.05 v1(29.4,53.65)
  Bottom Layer w0.254: U14.3.4 18.502,46.746 18.502,48.713 19.239,49.45 25.2,49.45 v1(29.4,53.65) ; C27.1 23.8,56.49 24.003,56.693 26.493,56.693 v1(27,57.2) 27,58.62 27.359,58.979 29.421,58.979 R33.1 30.2,58.572 33.121,61.493 42.781,61.493 v1(43.442,62.154)
NetC28_1: C28.1 D2.2 R34.1 U7.2 U10.6 U14.3.5 | length 120.5
  Top Layer w0.254: U10.6 31.094,56.765 31.678,56.181 31.678,54.961 32.639,54 34.806,54 37.085,56.28 37.085,56.897 37.592,57.404 40.03,57.404 40.284,57.658 40.284,59.969 39.5,60.754 v1(39.5,63.83) ; U7.2 34.12,11.335 v1(34.889,10.566)
  Signal Layer 2 w0.254: v1(32.65,44.1) 35.019,44.1 36.282,45.363 ; v1(34.889,10.566) 36.614,12.291 36.614,20.19 37.056,20.632 37.056,23.253 36.282,24.027 36.282,27.377 37.056,28.151 37.056,38.153 36.65,38.559 36.65,44.995 36.282,45.363 ; v1(39.5,63.83) 39.5,56.106 36.65,53.256 36.65,49.081 36.282,48.713 36.282,45.363
  Bottom Layer w0.254: U14.3.5 19.892,48.308 21.3,46.9 30.1,46.9 30.75,46.25 30.75,45.25 31.9,44.1 v1(32.65,44.1) ; R34.1 C28.1 23.8,59.233 28.167,63.6 39.27,63.6 v1(39.5,63.83)
NetC29_1: C29.1 D3.2 R35.1 U8.2 U11.2 U14.3.6 | length 139.7
  Top Layer w0.254: U11.2 16.967,58.035 17.6,57.402 v1(17.6,57.05) ; U8.2 24.865,11.335 25.705,10.495 v1(25.705,6.299) ; v1(33.492,62.992) 33.503,62.992 34.095,62.4 D3.2@34.8,62.4
  Signal Layer 1 w0.254: v1(26.3,11.65) 26.1,11.65 25.85,11.9 25.85,13.15 25.847,13.153 25.803,13.153 25.453,13.503 25.453,15.503 27.05,17.1 v1(27.05,20.9)
  Signal Layer 2 w0.254: v1(25.705,6.299) 26.3,6.894 v1(26.3,11.65) ; 26.797,21.103 26.797,22.149 28.669,24.02 28.662,24.027 28.662,35.645 28.473,35.833 28.473,36.328 28.662,36.517 28.662,61.847 29.807,62.992 v1(33.492,62.992)
  Bottom Layer w0.254: U14.3.6 15.858,46.85 14,46.85 13.1,47.75 13.1,51.65 17.571,56.121 17.571,57.021 v1(17.6,57.05) 17.571,57.079 17.571,58.954 17.85,59.234 17.85,59.25 19.275,59.25 19.8,58.725 ; C29.1 19.8,58.725 ; R35.1 27.8,55.146 23.171,55.146 22.911,55.405 22.911,60.858 21.742,62.027 ; v1(33.492,62.992) 39.624,62.992 40.107,63.475 40.107,64.516 39.624,64.999 37.717,64.999 37.516,64.797 36.684,64.797 36.481,65 27.281,65 24.308,62.027 21.742,62.027 ; 19.8,58.725 20.257,59.182 20.257,62.027 21.742,62.027
NetC30_1: C30.1 D4.2 R36.1 U9.2 U11.6 U14.3.7 | length 104.5
  Top Layer w0.254: U9.2 17.279,11.335 17.486,11.542 17.486,13.757 17.295,13.948 17.295,17.675 16.951,18.019 10.69,18.019 10.014,18.694 10.014,27.972 18.096,36.054 18.096,46.634 v1(17.805,46.925) ; v1(18.377,61.354) 18.377,57.798 18.812,57.362 18.812,57.1 19.147,56.765 22.149,56.765 22.619,57.236 22.619,57.925 23.368,58.674 26.035,58.674 28.397,61.036 28.397,61.57 29.228,62.4 D4.2@30,62.4
  Signal Layer 2 w0.254: v1(17.805,46.925) 18.377,47.496 v1(18.377,61.354)
  Bottom Layer w0.254: U14.3.7 18.096,49.464 ; v1(17.805,46.925) 18.096,47.215 18.096,49.464 ; C30.1 19.8,55.146 ; R36.1 30.2,55.067 29.387,54.254 23.419,54.254 22.528,55.146 19.8,55.146 ; 18.096,49.464 19.8,51.168 19.8,55.146
NetC31_1: C31.1 X1.4 | length 18.5
  Top Layer w0.254: X1.4 2.05,11.95 10.072,11.95 12.26,9.762 12.26,4.935 12.796,4.4 C31.1
NetC32_1: C32.1 X1.3 | length 21.5
  Top Layer w0.254: X1.3 3.6,12.4 10.982,12.4 12.667,10.715 12.667,6.116 13.614,5.169 14.821,5.169 15.24,4.4 C32.1
NetC32_2: C32.2 R37.2 | length 5.8
  Top Layer w0.254: C32.2 16.45,1.768 v1(16.45,1.75) ; v1(18.45,3.7) 18.75,3.7 19.45,4.4 R37.2
  Signal Layer 1 w0.254: v1(16.45,1.75) 16.55,1.75 18.45,3.65 v1(18.45,3.7)
NetC34_1: C34.1 D5.1 M2.2 Q1.2 | length 79
  Top Layer w0.254: M2.2 3.5,57.785 4.674,57.785 6.094,56.365 6.094,53.266 6.706,52.654 9.104,52.654 9.7,53.25 Q1.2 ; v1(20.752,63.17) 21.522,62.4 D5.1@22.6,62.4
  Bottom Layer w0.254: C34.1 14.8,23.444 15.392,24.037 15.392,35.56 6.706,44.247 6.706,54.694 M2.2 3.5,58.847 7.823,63.17 v1(20.752,63.17)
NetC37_1: C37.1 U15.4 | length 6.5
  Top Layer w0.254: U15.4 35.404,55.495 36.678,56.769 36.678,58.128 v1(36.95,58.4)
  Bottom Layer w0.254: C37.1 35.8,58.42 35.82,58.4 v1(36.95,58.4)
NetC37_2: C37.2 U15.2 | length 10
  Top Layer w0.254: v1(33.553,54.635) 32.601,54.635 32.169,55.067 32.169,57.709 32.495,58.035 U15.2
  Bottom Layer w0.254: v1(33.553,54.635) 33.553,57.553 C37.2 C37.2@34.2,58.064
NetD1_1: D1.1 U10.1 | length 36.7
  Top Layer w0.254: v1(18.999,60.325) 19.021,60.304 19.021,57.774 19.391,57.404 21.857,57.404 22.213,57.76 22.213,58.306 22.987,59.08 23.626,59.08 U10.1 ; v1(37.1,65.8) 39.813,65.8 41.6,64.013 D1.1
  Signal Layer 1 w0.254: v1(18.999,60.325) 21.156,60.325 26.631,65.8 v1(37.1,65.8)
NetD2_1: D2.1 U10.7 | length 9.2
  Top Layer w0.254: U10.7 31.187,58.035 32.309,59.157 32.309,59.741 33.884,61.316 35.789,61.316 36.5,62.027 D2.1@36.5,62.4
NetD3_1: D3.1 U11.1 | length 42.6
  Top Layer w0.254: U11.1 16.535,59.305 v1(17.537,60.306) ; v1(31.293,61.087) 31.8,61.594 D3.1@31.8,62.4
  Bottom Layer w0.254: v1(17.537,60.306) 17.537,61.86 18.237,62.56 24.26,62.56 27.435,65.735 36.321,65.735 36.853,65.203 37.347,65.203 37.879,65.735 39.624,65.735 40.513,64.846 40.513,63.043 39.446,61.976 32.182,61.976 v1(31.293,61.087)
NetD4_1: D4.1 U11.7 | length 8.9
  Top Layer w0.254: U11.7 21.656,58.035 21.656,58.35 24.622,61.316 26.746,61.316 27,61.57 D4.1@27,62.4
NetD7_C: D7.C R39.1 | length 13.2
  Top Layer w0.254: R39.1 14.4,64.733 14.4,68.2 15.8,69.6 19.7,69.6 D7.C
NetD8_C: D8.C R42.2 | length 17.9
  Top Layer w0.254: R42.2 14.933,64.383 v1(15.35,64.8) ; D8.C 28.325,67.875 v1(29.3,66.9)
  Bottom Layer w0.254: v1(15.35,64.8) 25.925,64.8 27.267,66.142 28.542,66.142 v1(29.3,66.9)
NetD9_C: D9.C R44.1 | length 25.4
  Top Layer w0.254: R44.1 v1(13.367,68.367) ; v1(33.75,69.3) 34.325,68.725 D9.C
  Bottom Layer w0.254: v1(13.367,68.367) 14.3,69.3 v1(33.75,69.3)
NetM1_1: M1.1 X1.8 | length 4
  Top Layer w0.254: M1.1 6.23,5.43 7.1,6.3 X1.8
NetM1_2: M1.2 X1.7 | length 5.6
  Top Layer w0.254: M1.2 4.1,3.82 4.1,6 5.1,7 X1.7
NetM1_3: M1.3 X1.5 | length 5.7
  Top Layer w0.254: X1.5 1.1,5.12 M1.3
NetM1_4: M1.4 X1.6 | length 2.5
  Top Layer w0.254: X1.6 3.1,5.58 M1.4
NetQ1_1: Q1.1 R41.2 U14.2.1 | length 91
  Top Layer w0.254: R41.2 1.075,61.57 2.167,62.662 6.706,62.662 7.849,63.805 7.849,68.275 8.611,69.037 10.058,69.037 11.024,68.072 11.024,62.408 9.957,61.341 7.235,61.341 6.5,60.606 6.5,54.901 Q1.1 7.401,55.067 7.984,55.65 12.204,55.65 12.685,55.17 12.685,51.003 13.589,50.099 27.295,50.099 28.092,49.301 28.092,45.745 29.058,44.78 40.259,44.78 40.792,45.314 40.792,47.316 U14.2.1
NetR1_1: R1.1 R7.1 R13.1 R19.1 R38.2 R43.3 R43.5 U16.1 | length 141
  Top Layer w0.254: R1.1 1.67,34.544 1.873,34.747 4.877,34.747 6.5,36.37 6.5,42.965 5.05,44.15 ; R43.3 3.096,42.202 3.543,42.649 3.549,42.649 5.05,44.15 ; U16.1 U16.1@7.061,19.918 ; R38.2 17.399,4.4 17.399,5.537 16.997,5.939 16.997,6.347 16.644,6.7 14.661,6.7 13.48,7.882 13.48,11.73 11.053,14.156 6.824,14.156 5.512,15.469 5.512,16.459 5.791,16.739 8.331,16.739 8.585,16.993 8.585,19.71 8.378,19.918 U16.1@7.061,19.918 ; v1(19.634,44.094) 20.472,44.933 20.472,48.971 20.142,49.301 9.144,49.301 8.875,49.032 ; 5.05,44.15 5.05,46.045 R43.5 3.705,47.45 7.293,47.45 8.875,49.032 ; U16.1@7.061,19.918 7.061,24.486 8.875,26.299 8.875,49.032
  Bottom Layer w0.254: v1(19.634,44.094) 27.94,44.094 31.217,40.817 31.217,39.369 31.928,38.659 33.405,38.659 R19.1 ; R13.1@41.6,33.42 40.8,34.22 40.8,35.86 40.36,36.3 36.856,36.3 34.167,38.989 R19.1 ; R7.1 41.6,40.933 41.308,40.641 36.665,40.641 35.788,39.764 34.167,39.764 R19.1
NetR25_2: R25.2 U14.1.0 | length 43.4
  Top Layer w0.254: R25.2 35.027,4.945 35.027,7.772 v1(35.611,8.357)
  Signal Layer 1 w0.254: U14.1.0 22.631,23.821 22.631,13.65 21.831,12.85 21.831,12.002 26.633,7.2 28.294,7.2 29.297,6.197 29.297,4.536 30.404,3.429 36.373,3.429 37.503,4.56 37.503,7.716 36.862,8.357 v1(35.611,8.357)
NetR27_2: R27.2 U14.1.2 | length 27.9
  Top Layer w0.254: U14.1.2 26.453,22.539 26.453,19.041 26.697,18.797 26.697,14.692 26.897,14.492 26.897,6.816 26.897,6.425 26.136,5.664 23.698,5.664 23.114,5.08 23.114,3.785 23.368,3.531 24.621,3.531 25.352,2.8 R27.2
NetR29_2: R29.2 U14.1.6 | length 51.7
  Top Layer w0.254: R29.2 21.45,4.4 21.45,7.201 21.996,7.747 21.996,12.167 v1(22.428,12.598)
  Signal Layer 1 w0.254: v1(22.428,12.598) 23.47,12.598 29.969,6.1 36.4,6.1 37.097,6.797 37.097,7.547 36.747,7.897 36.253,7.897 36.116,7.76 35.121,7.76 34.747,8.134 34.747,8.89 36.614,10.757 36.614,16.548 35.408,17.755 35.408,19.456 38.252,22.301 38.252,25.98 U14.1.6
NetR31_2: R31.2 U9.3 U14.2.0 U14.3.3 | length 84
  Top Layer w0.254: U9.3 16.916,10.065 ; U14.3.3 21.031,47.319 21.031,37.795 21.311,37.516 21.311,33.35 15.951,27.991 15.951,23.444 17.701,21.694 17.701,14.364 17.892,14.173 17.892,10.888 17.069,10.065 16.916,10.065 ; R31.2 30.089,4.4 29.489,3.8 29.489,2.362 28.377,1.25 21.661,1.25 21.006,1.905 21.006,5.976 16.916,10.065
  Signal Layer 1 w0.254: U14.3.3 23.008,47.32 38.248,47.32 U14.2.0
NetR37_1: R37.1 R38.1 R43.6 U16.2 | length 67.6
  Top Layer w0.254: v1(1,40.25) 0.95,40.3 0.95,49.65 1.25,49.95 2,49.95 3.025,48.925 R43.6 ; U16.2 4.145,18.648 3.581,18.085 3.581,15.806 5.637,13.75 10.532,13.75 13.073,11.209 13.073,7.425 14.935,5.563 15.697,5.563 16.247,5.013 16.247,3.495 16.941,2.8 R38.1 R37.1
  Bottom Layer w0.254: v1(1,40.25) 1,26.706 0.7,26.406 0.7,20.9 v1(3.55,18.05)
NetR39_2: R39.2 U14.2.2 | length 39.5
  Top Layer w0.254: R39.2 11.767,62.071 13.091,60.747 13.091,52.951 15.537,50.505 27.707,50.505 28.503,49.709 28.503,47.875 29.058,47.32 35.708,47.32 U14.2.2
NetR40_2: R40.2 S1.2 U14.2.7 | length 28.9
  Top Layer w0.254: S1.2 16.1,65.7 R40.2 18.1,62.95 19.35,61.7 v1(19.35,61.5)
  Signal Layer 1 w0.254: v1(23.65,53.55) 25.15,52.05 30.05,52.05 32.18,49.92 U14.2.7
  Signal Layer 2 w0.254: v1(19.35,61.5) 23.65,57.2 v1(23.65,53.55)
NetR42_1: R42.1 U14.2.3 | length 31.5
  Top Layer w0.254: v1(16.1,60.6) 16.1,63.267 R42.1
  Signal Layer 1 w0.254: v1(16.1,60.6) 16.1,57.23 17.856,55.474 25.721,55.474 26.702,54.493 27.029,54.165 27.298,54.165 28.514,52.95 32.618,52.95 U14.2.3
NetR43_1: R43.1 U14.1.1 | length 39.7
  Top Layer w0.254: R43.1 1.796,40.354 2.3,39.85 v1(5.9,39.85)
  Signal Layer 1 w0.254: v1(14,22.45) 14.047,22.497 21.897,22.497 v1(21.9,22.5)
  Signal Layer 2 w0.254: v1(21.9,22.5) 23.15,23.75 23.15,25.562 U14.1.1
  Bottom Layer w0.254: v1(5.9,39.85) 6.6,39.15 6.6,29.85 v1(14,22.45)
NetR43_2: R43.2 U14.1.3 | length 74
  Top Layer w0.254: R43.2 2.446,40.504 2.639,40.311 3.949,40.311 5.788,42.15 v1(5.85,42.15) ; v1(7.506,38.151) v1@7.506,38.237
  Signal Layer 1 w0.254: v1(7.506,38.151) 4.267,38.151 3.962,37.846 3.962,35.89 5.953,33.9 35.8,33.9 37.6,32.1 37.6,31.4 41.961,27.039 41.961,26.213 41.554,25.806 40.132,25.806 37.338,28.6 34.85,28.6 33.401,27.151 33.401,26.619 32.766,25.984 30.628,25.984 U14.1.3
  Bottom Layer w0.254: v1(5.85,42.15) 7.506,40.494 v1(7.506,38.151)
NetR43_7: R43.7 U14.1.7 | length 52.9
  Top Layer w0.254: R43.7 2.35,47.395 2.35,45.4 v1(2.743,45.007)
  Signal Layer 1 w0.254: v1(2.743,45.007) 2.743,31.267 3.861,30.15 27.102,30.15 28.194,29.058 28.194,26.314 29.058,25.451 33.199,25.451 U14.1.7
NetR44_2: R44.2 U14.2.4 | length 37.7
  Top Layer w0.254: R44.2 12.55,64.617 12.55,61.863 13.497,60.915 13.497,53.12 15.705,50.912 27.875,50.912 29.037,49.75 v1(29.9,49.75)
  Bottom Layer w0.254: v1(29.9,49.75) 31.2,48.45 31.2,47.65 32.05,46.8 33.688,46.8 U14.2.4
VCC: C20.1 C22.1 C24.1 C26.1 C34.2 C35.2 D5.2 D7.A D8.A D9.A M2.1 R26.2 R28.2 R30.2 R32.2 R43.8 S1.1 U1.8 U2.8 U3.8 U4.8 U5.8 U6.8 U7.8 U8.8 U9.8 U10.8 U11.8 U13.1 U14.VDDA U14.VDDD U14.VDDR U15.8 U16.8 X1.1 | length 416.4
  Top Layer w0.254: R43.8 v1(1.725,48.775) ; M2.1 2.438,56.962 2.438,58.395 5.791,61.747 7.152,61.747 8.6,63.195 8.6,65.43 9.1,65.93 S1.1 ; U16.8 11.95,21.591 13.403,23.044 ; v1@13.403,21.353 13.403,23.044 ; U14.VDDA 15.464,47.244 17.259,47.244 17.794,47.779 18.085,47.779 18.502,47.362 18.502,38.176 19.99,36.689 19.99,34.747 13.422,28.18 13.422,23.063 13.403,23.044 ; v1(17.1,66.2) 18.475,67.575 D7.A ; U9.8 19.101,12.605 18.705,13.001 18.705,14.881 18.514,15.072 18.514,19.105 19.327,19.918 20.625,19.918 20.625,32.043 25.026,36.444 25.026,36.736 26.467,38.176 27.424,38.176 28.245,37.355 28.245,33.549 28.5,33.294 28.5,22.648 v1(29.05,22.098) U3.8 ; U11.8 21.865,59.305 D5.2@24.96,62.4 ; v1@23.325,67.875 D8.A ; R30.2 24.39,4.4 25.248,5.258 26.619,5.258 27.303,5.942 27.303,6.647 27.457,6.802 27.457,7.849 ; D5.2@24.665,62.4 D5.2@24.96,62.4 ; 26.711,64.17 26.721,64.16 ; R28.2 28.143,4.4 28.143,4.896 28.497,5.25 28.497,6.809 27.457,7.849 ; U3.8@28.245,19.905 27.432,19.905 27.103,19.576 27.103,15.489 27.927,14.666 U8.8@27.927,12.605 ; U8.8 U8.8@27.927,12.605 ; U10.8 29.65,60.55 v1(30,60.9) ; v1(29.875,67.875) D9.A ; R32.2 32.493,2.8 33.147,3.454 35.255,3.454 35.91,2.8 37.135,2.8 37.557,3.222 37.557,6.239 39.262,7.944 39.262,12.395 39.052,12.605 35.706,12.605 33.122,15.189 31.674,15.189 31.217,15.646 31.217,16.459 31.482,16.724 34.265,16.724 35.409,17.869 35.409,19.348 35.42,19.359 ; v1(34.1,64.4) 34.9,63.6 ; U14.VDDD 37.26,20.295 U2.8 35.966,19.905 35.42,19.359 ; 37.49,59.305 U15.8@38.506,59.305 ; 38.506,63.1 U15.8@38.506,59.305 ; 38.506,63.17 38.087,63.589 32.88,63.589 32.309,64.16 26.721,64.16 ; U15.8 U15.8@38.506,59.305 ; v1@40.792,60.6 40.792,56.591 41.25,56.134 44.755,56.134 46.25,54.639 ; U6.8 47.108,12.605 47.803,13.3 47.803,17.752 ; U5.8 47.205,59.305 46.25,58.35 46.25,54.639 ; D5.2@24.96,62.4 25.6,62.4 D5.2@25.6,63.04 ; D5.2@24.96,62.4 D5.2@25.6,63.04 ; D5.2@25.6,63.04 26.721,64.16 ; 27.457,7.849 27.457,12.395 27.667,12.605 U8.8@27.927,12.605 ; 35.42,19.359 35.42,18.477 35.892,18.006 47.549,18.006 47.803,17.752 ; 46.25,54.639 U1.8 47.549,19.905 47.803,19.651 47.803,17.752
  Signal Layer 1 w0.254: U14.VDDA 12.75,46.658 12.75,45.65 13.62,44.78 41.352,44.78 U14.VDDR ; v1(29.05,22.098) 32.461,22.098 33.579,23.216 36.044,23.216 U14.VDDD ; v1(30,60.9) 33.5,64.4 v1(34.1,64.4) ; v1(38.5,60.6) v1(40.8,60.6)
  Signal Layer 2 w0.254: U14.VDDD 40.75,27.922 40.75,44.178 U14.VDDR
  Bottom Layer w0.254: X1.1 7.894,12.106 12.548,12.106 13.004,11.65 19.854,11.65 20.178,11.974 ; v1(3.6,21.35) v1(13.4,21.35) ; C34.2 16.281,17.5 16.281,16.84 15.646,16.205 15.646,14.404 15.9,14.15 16.67,14.15 16.929,14.409 16.929,15.583 ; 16.942,15.596 17.396,16.05 19.97,16.05 20.429,15.591 20.429,14.156 19.862,13.588 19.862,13.288 20.178,12.972 20.178,11.974 ; C20.1 C26.1 21.768,9.768 ; C24.1 28.931,10.6 28.278,11.252 27.032,11.252 26.846,11.066 26.846,10.446 C22.1 24.655,9 23.901,9.754 21.914,9.754 21.768,9.9 21.768,11.125 21.336,11.557 20.594,11.557 20.178,11.974
  other v1: 23.3,67.85
pads on no net: D7. D8. D9. Q1. U5.6 U5.7 U6.5 U6.6 U7.5 U7.6 U8.5 U8.6 U9.5 U9.6 U14.0.4 U14.0.5 U14.0.6 U14.0.7 U14.1.4 U14.1.5 U14.2.5 U14.2.6 U14.4.0 U14.4.1 U14.5.0 U14.5.1 U14.VREF U14.XRES U15.6 U15.7 U16.7
copper on no net:
  other v2: 47.5,2.5 2.5,67.5 47.5,67.5

## Polygon pours and split planes (outlines as drawn)
GND on Signal Layer 2 "Signal Layer 2 - GND" (solid, pour order 10): 0,70 50,70 50,0 10,0 10,11 0,11 0,70
VCC on Signal Layer 1 "Signal Layer 1 - VCC" (solid, pour order 9): 0,12 2.25,12 5.5,12 5.45,12.05 5.45,51.35 13.6,51.35 13.6,61.15 14.75,62.3 41.95,62.3 41.95,70 7.7,70 7.7,64.35 6.15,62.8 0,62.8

## Keep-outs
Top Layer:
  lines w0.254: 0,9 8,9 8,0 ; 0,11 10,11 10,0
Keep-Out Layer:
  circle w0.254: c47.5,67.5 r4.242
  circle w0.254: c47.5,2.5 r4.242
  circle w0.254: c2.5,67.5 r4.242

## Silkscreen, mask and mechanical layers (free items; w line width, h text height)
Mechanical 1:
  lines w0.254: 50,0 50,70 ; 50,0 50,0 ; 50,0 0,0 0,70 50,70 ; 50,70 50,70